# Altium PCB SchemaAf.PcbDoc
Units mil, origin at the board's own origin, x right, y up, seen from the top; angles counter-clockwise.
Board outline 6000 x 2300 mil, 2 copper layers (Top Layer, Bottom Layer); 71 components, 51 nets, 252 pads, 100 vias.
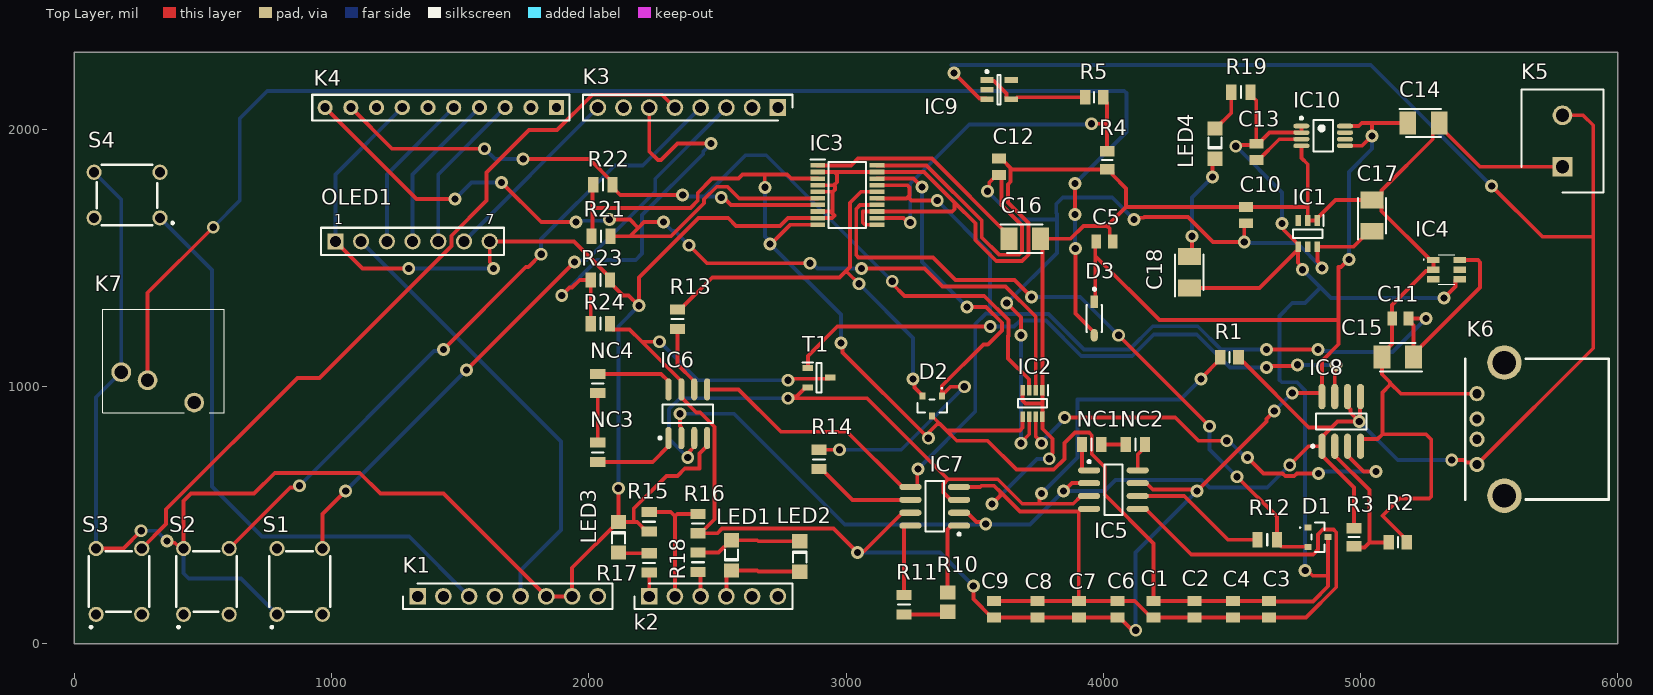
[diagram p0: Top Layer view]
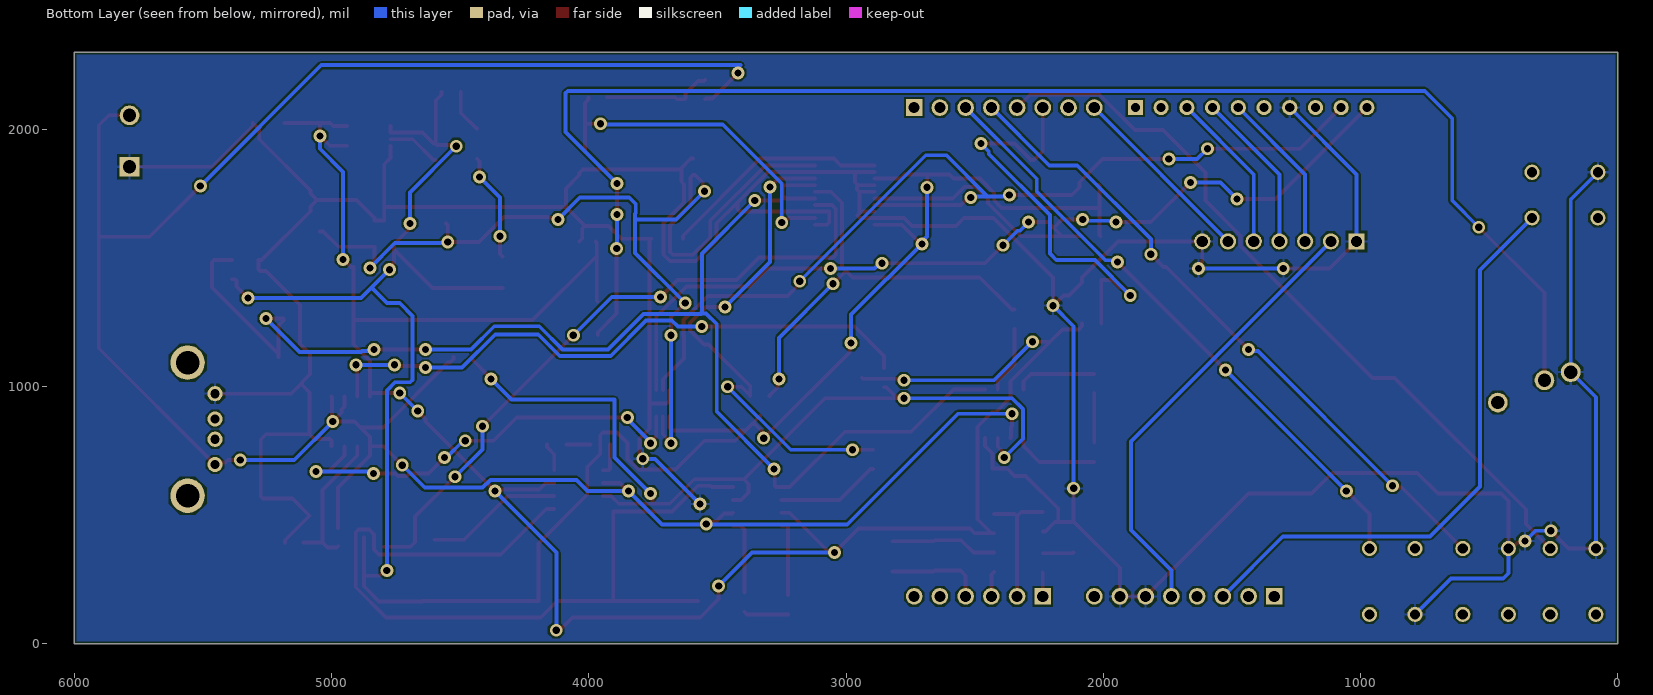
[diagram p1: Bottom Layer view, seen from below]
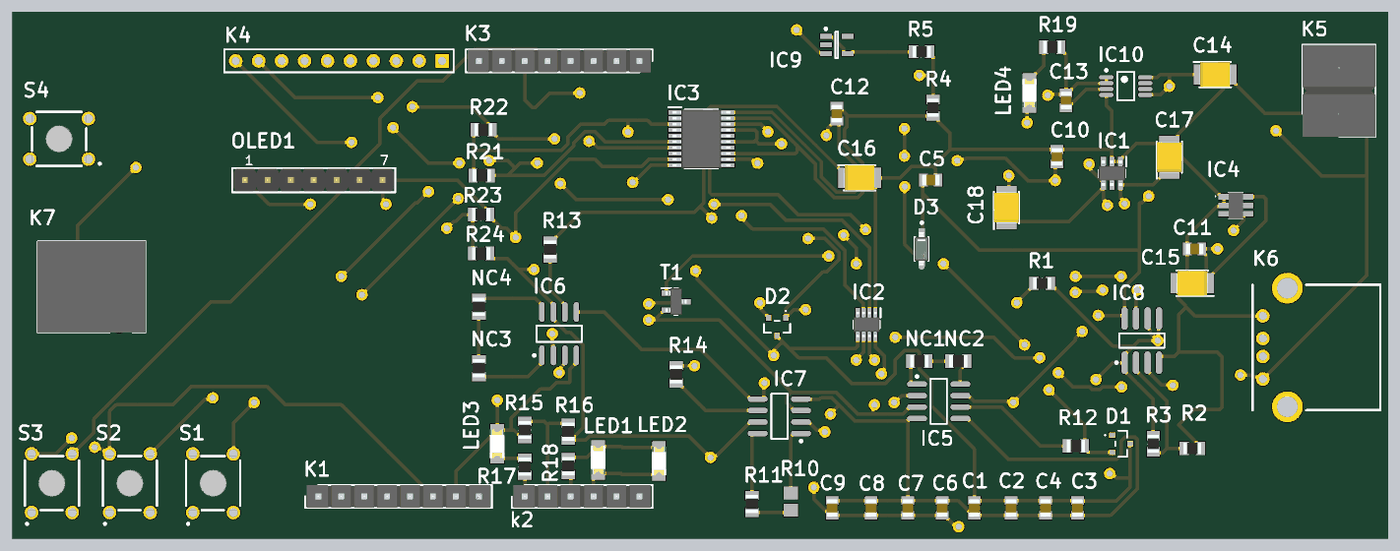
[diagram p2: 3D render of the assembled board from above, using the file's embedded part models]

## Layer stack, top to bottom
Top Solder: solder mask 0.4, Solder Resist, Dk 3.5
Top Layer: signal copper 1.4
Dielectric 1: dielectric 12.6, FR-4, Dk 4.8
Bottom Layer: signal copper 1.4
Bottom Solder: solder mask 0.4, Solder Resist, Dk 3.5

## Board outline
0,0 0,2300 6000,2300 6000,0

## Design rules (kind name [scope] priority, off if disabled: settings)
Clearance [All] p1: gap=7 ignorepadtopadclearanceinfootprint=FALSE
ComponentClearance [All] p1 off: gap=10 collisioncheckmode=3 verticalgap=10 showdistances=FALSE
PolygonConnect [All] p1: connectstyle=Relief reliefconductorwidth=10 reliefentries=4 polygonreliefangle="90 Angle" airgapwidth=10
RoutingVias [All] p1: holewidth=28 width=50 viastyle="Through Hole" minholewidth=28 minwidth=50 maxholewidth=28 maxwidth=50
SolderMaskExpansion [All] p1: expansion=4 istentingtop=FALSE
Width [All] p1: maxlimit=15 minlimit=15 preferedwidth=15 minimp=50.000000 maximp=50.000000 favimp=50.000000
29 further rules are at their usual default settings.

## Components (designator, comment, footprint, x,y, rotation, side; value= is the part's Value field where it differs from the comment)
C1 "MC0805B104K500CT" CAPC2012X90N 4195,135 r270 top
C2 "MC0805B104K500CT" CAPC2012X90N 4355,135 r270 top
C3 "MC0805B104K500CT" CAPC2012X90N 4645,135 r270 top
C4 "MC0805B104K500CT" CAPC2012X90N 4505,135 r270 top
C5 "MC0805B104K500CT" CAPC2012X90N 4005,1565 r180 top
C6 "MC0805B104K500CT" CAPC2012X90N 4055,135 r270 top
C7 "MC0805B104K500CT" CAPC2012X90N 3905,135 r270 top
C8 "MC0805B104K500CT" CAPC2012X90N 3745,135 r270 top
C9 "MC0805B104K500CT" CAPC2012X90N 3575,135 r270 top
C10 "MC0805B104K500CT" CAPC2012X90N 4555,1666.89 r270 top
C11 "MC0805B104K500CT" CAPC2012X90N 5155,1265 r0 top
C12 "MC0805B104K500CT" CAPC2012X90N 3595,1855 r90 top
C13 "MC0805N102J500CT" CAPC2012X90N 4595,1913.11 r90 top
C14 "T491B106M016AT" CAPPM3528X210N 5245,2025 r0 top
C15 "T491B106M016AT" CAPPM3528X210N 5145,1115 r180 top
C16 "T491B106M016AT" CAPPM3528X210N 3695,1575 r0 top
C17 "T491B106M016AT" CAPPM3528X210N 5045,1665 r90 top
C18 "T491B106M016AT" CAPPM3528X210N 4335,1445 r90 top
D1 "BAT54C" NXP-SOT23-3_V 4835,415 r90 top
D2 "BAT54C" NXP-SOT23-3_V 3335,925 r0 top
D3 "1N5819HW-7-F" FP-SOD123-IPC_B 3965,1265 r270 top
IC1 "LT1790ACS6-2.5#PBF" SOT95P280X100-6N 4795,1595 r270 top
IC2 "LTC2631CTS8-LZ12#TRMPBF" SOT65P280X100-8N 3725,935 r270 top
IC3 "LTC2309CF#PBF" SOP65P640X110-20N 3005,1745 r0 top
IC4 "LT1790BCS6-1.25#TRMPBF" LT1790BCS6125TRMPBF 5335,1455 r270 top
IC5 "LT1789CS8-1#PBF" LT-S8-8_N 4039.49,600 r0 top
IC6 "LT1789CS8-10#PBF" LT-S8-8_N 2385,895 r90 top
IC7 "LT1789CS8-10#PBF" LT-S8-8_N 3345,535 r180 top
IC8 "LTC6241HVCS8#PBF" LT-S8-8_M 4925,865 r90 top
IC9 "LTC2054HVCS5#TRMPBF" LT-S5-5-TSOT-23_N 3595,2155 r0 top
IC10 "LT1762EMS8-5#PBF" LT-MS8_N 4855,1975 r0 top
K1 "2211S-08G" HDRV8W64P0X254_1X8_2032X254X874P 1335,185 r0 top
k2 "2211S-06G" HDRV6W64P0X254_1X6_1524X254X1774P 2235,185 r0 top
K3 "2211S-08G" HDRV8W64P0X254_1X8_2032X254X874P 2735,2085 r180 top
K4 "Header 10" HDR1X10 1875,2085 r180 top
K5 "1729128" HDRV2W110P0X508_1X2_1016X810X1000P 5785,1855 r90 top
K6 "61400416021" USB-2.0-TYPE-A 5965,835 r90 top
K7 "NEB_J_21_R" NEBJ21R 182.64,1056.5 r0 top
LED1 "150120RS75000" 1206_A 2555,344.06 r90 top
LED2 "150120GS75000" 1206_A 2820,340 r270 top
LED3 "150120YS75000" 1206_A 2115,415 r270 top
LED4 "150120BS75000" 1206_A 4435,1945 r90 top
NC1 "0" RESC2014X65N 3955,775 r180 top
NC2 "0" RESC2014X65N 4125,775 r0 top
NC3 "MC01W08055100R" RESC2014X65N 2035,745 r270 top
NC4 "0" RESC2014X65N 2035,1012.4 r90 top
OLED1 "61300711121" 61300711121 1315,1565 r0 top
R1 "MCTC0525B1000T5E" RESC2012X65N 4490.43,1115 r0 top
R2 "MCTC0525B1002T5E" RESC2012X65N 5145,395 r180 top
R3 "MCTC0525B1002T5E" RESC2012X65N 4975,415 r270 top
R4 "MCTC0525B1002T5E" RESC2012X65N 4015,1880.43 r90 top
R5 "MCTC0525B1002T5E" RESC2012X65N 3965,2125 r180 top
R10 "ERA6AEB223V" RESC2013X60X40ML20T25 3395,162.4 r90 top
R11 "220R 0.1%" RESC2014X65N 3225,152.4 r90 top
R12 "MC01W08055100R" RESC2014X65N 4637.6,405 r0 top
R13 "MC01W08055100R" RESC2014X65N 2345,1262.4 r90 top
R14 "100R" RESC2014X65N 2895,717.6 r90 top
R15 "3KR" RESC2014X65N 2235,475 r90 top
R16 "MC01W0805512K" RESC2014X65N 2425,467.6 r270 top
R17 "MC01W080551K" RESC2014X65N 2235,315 r270 top
R18 "MC01W080551K" RESC2014X65N 2425,317.6 r270 top
R19 "MC01W080551K" RESC2014X65N 4535,2145 r0 top
R21 "MC01W0805510K" RESC2014X65N 2047.6,1585 r180 top
R22 "MC01W0805510K" RESC2014X65N 2055,1785 r180 top
R23 "MC01W0805510K" RESC2014X65N 2045,1415 r180 top
R24 "22KR" RESC2014X65N 2045,1245 r0 top
S1 "FSM4JH" FSM4JH 876.42,242.95 r90 top
S2 "FSM4JH" FSM4JH 513.58,242.95 r90 top
S3 "FSM4JH" FSM4JH 173.58,242.95 r90 top
S4 "FSM4JH" FSM4JH 205,1745 r180 top
T1 "BC847C_AU,215" SOT95P230X110-3N 2895,1035 r0 top

## Footprints (in the part's own frame and the unit in brackets; to place one, negate y for a bottom-side part, rotate by r counter-clockwise, add the part's x,y. Pads: shape width x height; smd on the part's side, far side on the other; paste and mask are expansions set on the pad)
1206_A [mm] "Chip LED, 2-Leads, Body 3.2x1.6mm, IPC Medium Density"
  rect 1.4x1.5 smd: 1(-1.5,0) 2(1.5,0)
  silkscreen extent -0.5,-0.67 0.6,0.65, body extent -1.6,-0.8 1.6,0.8, height 0.68
61300711121 [mm] "Pin Header, pitch 2.54 mm, THT, Vertical, single row, 7p"
  rect 1.6x1.6 hole 1.1: 1(-7.62,0)
  round 1.6 hole 1.1: 2(-5.08,0) 3(-2.54,0) 4(0,0) 5(2.54,0) 6(5.08,0) 7(7.62,0)
  silkscreen extent -9.04,-1.34 9.04,1.34, body extent -8.89,-1.27 8.89,1.27, height 8.57
CAPC2012X90N [mm]
  rect 0.96x1.39 smd: 1(-0.81,0) 2(0.81,0)
  body extent -1,-0.63 1,0.63, height 0.9
CAPPM3528X210N [mm]
  rect 1.65x2.25 smd: 1(-1.55,0) 2(1.55,0)
  silkscreen extent -2.38,-1.4 1.75,1.4, body extent -1.75,-1.4 1.75,1.4, height 2.1
FP-SOD123-IPC_B [mil]
  rect 49.51x27.66 smd paste+0 mask+0: 1(-64.98,0)
  rrect100% 49.51x27.66 smd paste+0 mask+0: 2(64.98,0)
  silkscreen extent -119,-31 52,31, body extent -100,-40 100,40, height 10
FSM4JH [mm]
  round 1.5 hole 1: 1(-3.25,2.25) 2(3.25,2.25) 3(-3.25,-2.25) 4(3.25,-2.25)
  silkscreen extent -4.6,-3 3,3, body extent -3,-3.9 3,3.9
HDR1X10 [mm] "Connector; Header; 10 Position"
  rect 1.5x1.5 hole 0.9: 1(0,0)
  round 1.5 hole 0.9: 2(2.54,0) 3(5.08,0) 4(7.62,0) 5(10.16,0) 6(12.7,0) 7(15.24,0) 8(17.78,0) 9(20.32,0) 10(22.86,0)
  silkscreen extent -1.27,-1.27 24.13,1.27
HDRV2W110P0X508_1X2_1016X810X1000P [mm]
  rect 1.95x1.95 hole 1.3: 1(0,0)
  round 1.95 hole 1.3: 2(5.08,0)
  silkscreen extent -2.54,-4.05 7.62,4.05, body extent -2.54,-4.05 7.62,4.05, height 10
HDRV6W64P0X254_1X6_1524X254X1774P [mm]
  rect 1.65x1.65 hole 1.1: 1(0,0)
  round 1.65 hole 1.1: 2(2.54,0) 3(5.08,0) 4(7.62,0) 5(10.16,0) 6(12.7,0)
  silkscreen extent -1.45,-1.27 14.15,1.27, body extent -1.27,-1.27 13.97,1.27, height 17.74
HDRV8W64P0X254_1X8_2032X254X874P [mm]
  rect 1.65x1.65 hole 1.1: 1(0,0)
  round 1.65 hole 1.1: 2(2.54,0) 3(5.08,0) 4(7.62,0) 5(10.16,0) 6(12.7,0) 7(15.24,0) 8(17.78,0)
  silkscreen extent -1.45,-1.27 19.23,1.27, body extent -1.27,-1.27 19.05,1.27, height 8.74
LT1790BCS6125TRMPBF [mm]
  rect 0.62x1.22 smd: 1(-0.95,-1.31) 2(0,-1.31) 3(0.95,-1.31) 4(0.95,1.31) 5(0,1.31) 6(-0.95,1.31)
  silkscreen extent -1.45,-2.3 1.45,0.81, body extent -1.45,-0.81 1.45,0.81, height 1.1
LT-MS8_N [mm] "SOP, 8-Leads, Body 3x3mm, Pitch 0.65mm, IPC Medium Density"
  oval 1.6x0.45 smd: 1(-2.15,0.975) 2(-2.15,0.325) 3(-2.15,-0.325) 4(-2.15,-0.975) 5(2.15,-0.975) 6(2.15,-0.325) 7(2.15,0.325) 8(2.15,0.975)
  silkscreen extent -2.27,-1.55 0.95,1.87, body extent -1.55,-1.55 1.55,1.55, height 1.1
LT-S5-5-TSOT-23_N [mm] "SOT23, 5-Leads, Body 2.90x1.63mm, Pitch 0.95mm, IPC Medium Density"
  rect 1.3x0.55 smd: 1(-1.2,0.95) 2(-1.2,0) 3(-1.2,-0.95) 4(1.2,-0.95) 5(1.2,0.95)
  silkscreen extent -1.32,-1.45 0.15,1.9, body extent -0.87,-1.45 0.87,1.45, height 1
LT-S8-8_M [mm] "SOIC, 8-Leads, Body 4.9x3.9mm, Pitch 1.27mm, IPC Low Density"
  oval 2.5x0.7 smd: 1(-2.45,1.905) 2(-2.45,0.635) 3(-2.45,-0.635) 4(-2.45,-1.905) 5(2.45,-1.905) 6(2.45,-0.635) 7(2.45,0.635) 8(2.45,1.905)
  silkscreen extent -2.57,-2.5 0.8,2.93, body extent -2,-2.5 2,2.5, height 1.76
LT-S8-8_N [mm] "SOIC, 8-Leads, Body 4.9x3.9mm, Pitch 1.27mm, IPC Medium Density"
  oval 2.2x0.6 smd: 1(-2.4,1.905) 2(-2.4,0.635) 3(-2.4,-0.635) 4(-2.4,-1.905) 5(2.4,-1.905) 6(2.4,-0.635) 7(2.4,0.635) 8(2.4,1.905)
  silkscreen extent -2.52,-2.5 0.9,2.88, body extent -2,-2.5 2,2.5, height 1.76
NEBJ21R [mm]
  round 1.95 hole 1.3: 1(0,0) 2(2.6,-0.8) 3(7.2,-3)
  silkscreen extent -1.84,-4 10.16,6.2, body extent -1.84,-4 10.16,6.2, height 8.1
NXP-SOT23-3_V [mm] "SOT23, 3-Leads, Body 1.3x2.9mm, Pitch 0.95mm"
  rect 0.6x0.7 smd paste-0.05: 1(0.95,1) 2(-0.95,1) 3(0,-1)
  silkscreen extent -1.45,-0.65 1.45,1.79, body extent -1.45,-0.65 1.45,0.65, height 1.1
RESC2012X65N [mm]
  rect 1.05x1.45 smd: 1(-0.9,0) 2(0.9,0)
  silkscreen extent 0,-0.53 0,0.53, body extent -1,-0.63 1,0.63, height 0.65
RESC2013X60X40ML20T25 [mm] "Chip Resistor, 2-Leads, Body 2.00x1.25mm, IPC Low Density"
  rect 1.4x1.55 smd: 1(-0.95,0) 2(0.95,0)
  body extent -1.1,-0.72 1.1,0.72, height 0.6
RESC2014X65N [mm]
  rect 1x1.5 smd: 1(-0.95,0) 2(0.95,0)
  silkscreen extent 0,-0.59 0,0.59, body extent -1,-0.69 1,0.69, height 0.65
SOP65P640X110-20N [mm]
  rect 1.45x0.45 smd: 1(-2.925,2.925) 2(-2.925,2.275) 3(-2.925,1.625) 4(-2.925,0.975) 5(-2.925,0.325) 6(-2.925,-0.325) 7(-2.925,-0.975) 8(-2.925,-1.625) 9(-2.925,-2.275) 10(-2.925,-2.925) 11(2.925,-2.925) 12(2.925,-2.275) 13(2.925,-1.625) 14(2.925,-0.975) 15(2.925,-0.325) 16(2.925,0.325) 17(2.925,0.975) 18(2.925,1.625) 19(2.925,2.275) 20(2.925,2.925)
  silkscreen extent -3.65,-3.25 1.85,3.5, body extent -3.2,-3.25 3.2,3.25, height 1.1
SOT65P280X100-8N [mm]
  rect 1.05x0.45 smd: 1(-1.3,0.975) 2(-1.3,0.325) 3(-1.3,-0.325) 4(-1.3,-0.975) 5(1.3,-0.975) 6(1.3,-0.325) 7(1.3,0.325) 8(1.3,0.975)
  silkscreen extent -1.82,-1.45 0.42,1.55, body extent -1.4,-1.45 1.4,1.45, height 1
SOT95P230X110-3N [mm]
  rect 1.05x0.6 smd: 1(-1.1,0.95) 2(-1.1,-0.95) 3(1.1,0)
  silkscreen extent -1.62,-1.45 0.22,1.5, body extent -1.15,-1.45 1.15,1.45, height 1.1
SOT95P280X100-6N [mm]
  rect 1.05x0.55 smd: 1(-1.3,0.95) 2(-1.3,0) 3(-1.3,-0.95) 4(1.3,-0.95) 5(1.3,0) 6(1.3,0.95)
  silkscreen extent -1.82,-1.45 0.43,1.58, body extent -1.4,-1.45 1.4,1.45, height 1
USB-2.0-TYPE-A [mm]
  round 1.5 hole 0.92: 1(-3.5,13.01) 2(-1,13.01) 3(1,13.01) 4(3.5,13.01)
  round 3.4 hole 2.3: 5(-6.57,10.3) 6(6.57,10.3)
  silkscreen extent -6.95,0 6.95,14.15

## Part data
C1 C2 C3 C4 C5 C6 C7 C8 C9 C10 C11 C12 C13: "Capacitor", Manufacturer_Name=MULTICOMP, Height=0.9mm
  C1 C2 C3 C4 C5 C6 C7 C8 C9 C10 C11 C12: Datasheet Link=https://componentsearchengine.com/Datasheets/2/MC0805B104K500CT.pdf, Manufacturer_Part_Number=MC0805B104K500CT
  C13: Datasheet Link=http://www.farnell.com/datasheets/1901289.pdf, Manufacturer_Part_Number=MC0805N102J500CT
C14 C15 C16 C17 C18: "Capacitor Polarised", Manufacturer_Name=Kemet, Mouser Part Number=80-T491B106M016, Arrow Part Number=T491B106M016AT, Arrow Price/Stock=https://www.arrow.com/en/products/t491b106m016at/kemet-corporation, Datasheet Link=https://componentsearchengine.com/Datasheets/2/T491B106M016AT.pdf, Height=2.1mm, Manufacturer_Part_Number=T491B106M016AT, Mouser Price/Stock=https://www.mouser.co.uk/ProductDetail/KEMET/T491B106M016AT?qs=WydH9nGI6cAnkEyQJLjSzA%3D%3D
D1 D2: library part CMP-0417-00003-1, "Schottky Barrier Diode, 30 V, 2 uA, -55 to 150 degC, 3-Pin SOT23, RoHS, Tape and Reel", Manufacturer="NXP Semiconductors", Temperature Range="-55 to 150 degC", Cd (pF)=10, ComponentLink1Description="Manufacturer URL", ComponentLink1URL=http://www.nxp.com/, ComponentLink2Description=Datasheet, ComponentLink2URL=http://www.nxp.com/documents/data_sheet/BAT54_SER.pdf, DatasheetVersion="Rev. 5", IR (uA)=2, Mounting Technology="Surface Mount", PackageDescription="3-Pin Plastic Surface-mounted Package, Body 1.3 x 2.9 mm, Pitch 0.95 mm", PackageReference=SOT23-3, Packing="Tape and Reel", PartNumber=BAT54C, RoHS=TRUE, Rth(j-a) (K/W)=500, Trr (ns)=5, VF (mV)=800, VR (V)=30
D3: library part CMP-0303-00003-3, "DIODE SCHOTTKY 40V 1A SOD123", Average Rectified Current=1A, Capacitance=110pF, Case/Package=SOD-123-2, Forward Voltage=450mV, Max Forward Surge Current (Ifsm)=25A, Max Operating Temperature=125°C, Max Power Dissipation=450mW, Max Repetitive Reverse Voltage (Vrrm)=40V, Min Operating Temperature=-65°C, Package Quantity=3000, Peak Reverse Current=50uA, Contact Plating=Tin, Current Rating=1A, Element Configuration=Single, Forward Current=1A, Height=1.25mm, Lead Free="Lead Free", Length=2.85mm, Max Reverse Voltage (DC)=40V, Number of Pins=2, Output Current=1A, Packaging="Tape and Reel", Peak Non-Repetitive Surge Current=25A, Polarity=Standard, Radiation Hardening=No, REACH SVHC="No SVHC", Termination=SMD/SMT, Voltage Rating (DC)=40V, Weight=0.000353oz, Width=1.7mm
IC1: "Integrated Circuit", Manufacturer_Name="Linear Technology", Mouser Part Number=584-1790ACS6-2.5PBF, Datasheet Link=https://componentsearchengine.com/Datasheets/2/LT1790ACS6-2.5#PBF.pdf, Height=1mm, Manufacturer_Part_Number=LT1790ACS6-2.5#PBF, Mouser Price/Stock=https://www.mouser.com/Search/Refine.aspx?Keyword=584-1790ACS6-2.5PBF
IC2: "Integrated Circuit", Manufacturer_Name="Analog Devices", Mouser Part Number=584-2631CTS8LZ12TMPF, Arrow Part Number=LTC2631CTS8-LZ12#TRMPBF, Arrow Price/Stock=https://www.arrow.com/en/products/ltc2631cts8-lz12trmpbf/analog-devices, Datasheet Link=https://www.analog.com/media/en/technical-documentation/data-sheets/2631fd.pdf, Height=1mm, Manufacturer_Part_Number=LTC2631CTS8-LZ12#TRMPBF, Mouser Price/Stock=https://www.mouser.co.uk/ProductDetail/Analog-Devices/LTC2631CTS8-LZ12TRMPBF?qs=hVkxg5c3xu%252BAZArayp8N8g%3D%3D
IC3: "Integrated Circuit", Manufacturer_Name="Linear Technology", Mouser Part Number=584-LTC2309CF#PBF, Arrow Part Number=LTC2309CF#PBF, Arrow Price/Stock=https://www.arrow.com/en/products/ltc2309cfpbf/linear-technology, Datasheet Link=http://docs-emea.rs-online.com/webdocs/10c2/0900766b810c2cad.pdf, Height=1.1mm, Manufacturer_Part_Number=LTC2309CF#PBF, Mouser Price/Stock=https://www.mouser.com/Search/Refine.aspx?Keyword=584-LTC2309CF%23PBF
IC4: "Integrated Circuit", Manufacturer_Name="Analog Devices", Mouser Part Number=584-1790BCS61.25TMPF, Arrow Part Number=LT1790BCS6-1.25#TRMPBF, Arrow Price/Stock=https://www.arrow.com/en/products/lt1790bcs6-1.25trmpbf/analog-devices, Datasheet Link=https://www.arrow.com/en/products/lt1790bcs6-1.25trmpbf/analog-devices, Height=1mm, Manufacturer_Part_Number=LT1790BCS6-1.25#TRMPBF, Mouser Price/Stock=https://www.mouser.co.uk/ProductDetail/Analog-Devices/LT1790BCS6-125TRMPBF/?qs=ytflclh7QUXpPD13KZ8jjg%3D%3D
IC5: library part CMP-0359-03660-2, "Single Channel, Micropower, Single Supply Rail-to-Rail Output Instrumentation Amplifiers, 0.06 MHz Typical GBW, 0.026 V/us Typical SR, 2.2 to 36 V, 8-Pin SOIC (S8-8), Commercial, Pb-Free", Linear Technology Part Number=LT1789-1, Manufacturer="Linear Technology", Channels (#)=1, ComponentLink1Description="Manufacturer URL", ComponentLink1URL=http://www.linear.com/, ComponentLink2Description=Datasheet, ComponentLink2URL=http://cds.linear.com/docs/en/datasheet/1789fc.pdf, ComponentLink3Description="Package Specification", ComponentLink3URL=http://cds.linear.com/docs/en/packaging/05081610_G_SO8.pdf, DatasheetVersion="Rev. C", GBW (MHz) Typical=0.06, Is (mA) Typical=0.067, Mounting Technology="Surface Mount", PackageDescription="8-Pin Plastic Small Outline, Body 4.9 x 3.9 mm, Pitch 1.27 mm", PackageReference=LT-S8-8, PackageVersion="Rev G", PartNumber=LT1789CS8-1#PBF, RevisionNote="URLs updated", RoHS=Pb-Free, SR (V/us) Typical=0.026, Type=IA, Vos (mV) Guaranteed=0.75, Vos (mV) Typical=0.15, Vs Max (V)=36, Vs Min (V)=2.2
IC6 IC7: library part CMP-0359-03644-3, "Single Channel, Micropower, Single Supply Rail-to-Rail Output Instrumentation Amplifiers, 0.06 MHz Typical GBW, 0.026 V/us Typical SR, 2.2 to 36 V, 8-Pin SOIC (S8-8), Commercial, Pb-Free", Linear Technology Part Number=LT1789-10, Manufacturer="Linear Technology", Channels (#)=1, ComponentLink1Description="Manufacturer URL", ComponentLink1URL=http://www.linear.com/, ComponentLink2Description=Datasheet, ComponentLink2URL=http://cds.linear.com/docs/en/datasheet/1789fc.pdf, ComponentLink3Description="Package Specification", ComponentLink3URL=http://cds.linear.com/docs/en/packaging/05081610_G_SO8.pdf, DatasheetVersion="Rev. C", GBW (MHz) Typical=0.06, Is (mA) Typical=0.067, Mounting Technology="Surface Mount", PackageDescription="8-Pin Plastic Small Outline, Body 4.9 x 3.9 mm, Pitch 1.27 mm", PackageReference=LT-S8-8, PackageVersion="Rev G", PartNumber=LT1789CS8-10#PBF, RevisionNote="URLs updated", RoHS=Pb-Free, SR (V/us) Typical=0.026, Type=IA, Vos (mV) Guaranteed=3, Vos (mV) Typical=0.65, Vs Max (V)=36, Vs Min (V)=2.2
IC8: library part CMP-0359-02698-2, "Dual Channel, Low Noise, CMOS Operational Amplifier, RRO, 18 MHz Typical GBW, 10 V/us Typical SR, 2.8 to 12 V, 8-Pin SOIC (S8-8), Commercial, Pb-Free", Linear Technology Part Number=LTC6241HV, Manufacturer="Linear Technology", Channels (#)=2, ComponentLink1Description="Manufacturer URL", ComponentLink1URL=http://www.linear.com/, ComponentLink2Description=Datasheet, ComponentLink2URL=http://cds.linear.com/docs/en/datasheet/624012fe.pdf, ComponentLink3Description="Package Specification", ComponentLink3URL=http://cds.linear.com/docs/en/packaging/05081610_G_SO8.pdf, DatasheetVersion="Rev. E", GBW (MHz) Typical=18, Is (mA) Typical=1.8, Mounting Technology="Surface Mount", PackageDescription="8-Pin Plastic Small Outline, Body 4.9 x 3.9 mm, Pitch 1.27 mm", PackageReference=LT-S8-8, PackageVersion="Rev G", PartNumber=LTC6241HVCS8#PBF, RevisionNote="URLs updated", RoHS=Pb-Free, SR (V/us) Typical=10, Type=VFB, Vos (mV) Typical=0.04, Vs Max (V)=12, Vs Min (V)=2.8
IC9: library part CMP-0359-02161-2, "Single Channel, Micropower Zero-Drift Operational Amplifier, 0.5 MHz Typical GBW, 0.5 V/us Typical SR, 2.7 to 11 V, 5-Pin SOT23 (S5-5), Commercial, Pb-Free, Mini Reel", Linear Technology Part Number=LTC2054HV, Manufacturer="Linear Technology", Channels (#)=1, Code_JEDEC=MO-193, ComponentLink1Description="Manufacturer URL", ComponentLink1URL=http://www.linear.com/, ComponentLink2Description=Datasheet, ComponentLink2URL=http://cds.linear.com/docs/en/datasheet/20545fc.pdf, ComponentLink3Description="Package Specification", ComponentLink3URL=http://cds.linear.com/docs/en/packaging/SOT_5_05-08-1635.pdf, DatasheetVersion="Rev. C", GBW (MHz) Typical=0.5, Is (mA) Typical=0.15, Mounting Technology="Surface Mount", PackageDescription="5-Lead Plastic TSOT-23, Body 1.63 x 2.90 mm, Pitch 0.95 mm", PackageReference=LT-S5-5-TSOT-23, Packing="Mini Reel", PartNumber=LTC2054HVCS5#TRMPBF, RevisionNote="URLs updated", RoHS=Pb-Free, SR (V/us) Typical=0.5, Type=ZD, Vos (mV) Typical=0.0005, Vs Max (V)=11, Vs Min (V)=2.7
IC10: library part CMP-0476-00707-1, "150 mA, Low Noise, LDO Micropower Regulator, 1.8 to 20 V Vin, 5 V Vout, 8-pin SOP (MS8-8), -40 to 125 degC, Pb-Free", Dropout Voltage(V)=0.27, Manufacturer="Linear Technology", Output Voltage="5 V", Shutdown Current(uA)=1, ComponentLink1Description="Manufacturer URL", ComponentLink1URL=http://www.linear.com/, ComponentLink2Description=Datasheet, ComponentLink2URL=http://cds.linear.com/docs/en/datasheet/1762fa.pdf, ComponentLink3Description="Package Specification", ComponentLink3URL=http://cds.linear.com/docs/en/packaging/05081660_G_MS8.pdf, DatasheetVersion="Rev. A", Discrete Pass Element=no, Iout(mA)=150, Isupply(mA)=0.025, Mounting Technology="Surface Mount", Noise(uV)=20, Number of Outputs=1, PackageDescription="8-Pin Plastic MSOP, Body 3 x 3 mm, Pitch 0.65 mm", PackageReference=MS8, PackageVersion="Rev. G, 05/2013", PartNumber=LT1762EMS8-5#PBF, PSRR(dB)=65, RoHS=TRUE, Vin Max(V)=20, Vin Min(V)=1.8
K1 k2 K3: "Connector", Manufacturer_Name=MULTICOMP
  K1 K3: Datasheet Link=https://componentsearchengine.com/Datasheets/2/2211S-08G.pdf, Height=8.74mm, Manufacturer_Part_Number=2211S-08G
  k2: Datasheet Link=http://www.farnell.com/datasheets/1518407.pdf, Height=17.74mm, Manufacturer_Part_Number=2211S-06G
K4: "Header, 10-Pin", LatestRevisionDate=17-Jul-2002, LatestRevisionNote="Re-released for DXP Platform.", Publisher="Altium Limited"
K5: "Connector", Manufacturer_Name="Phoenix Contact", Mouser Part Number=651-1729128, Arrow Part Number=1729128, Arrow Price/Stock=https://www.arrow.com/en/products/1729128/phoenix-contact, Datasheet Link=http://docs-emea.rs-online.com/webdocs/1380/0900766b81380189.pdf, Height=10mm, Manufacturer_Part_Number=1729128, Mouser Price/Stock=https://www.mouser.co.uk/ProductDetail/Phoenix-Contact/1729128/?qs=GFUSqQMLmmnCBVBY3dts9w%3D%3D
K6: "Connector", Manufacturer_Name="Wurth Elektronik", Mouser Part Number=710-61400416021, Datasheet Link=http://katalog.we-online.de/em/datasheet/61400416021.pdf, Manufacturer_Part_Number=61400416021, Mouser Price/Stock=https://www.mouser.co.uk/ProductDetail/Wurth-Elektronik/61400416021/?qs=rS3zZhy2AQM1ZldAqz%2FFOw%3D%3D
K7: "Connector", Manufacturer_Name=LUMBERG, Manufacturer_Part_Number="NEB/J 21 R", Datasheet Link=http://www.farnell.com/datasheets/2047481.pdf?_ga=2.269136052.479969064.1560760329-167411096.1502103357, Height=8mm
LED1: library part CMP-1426-00013-1, "SMD mono-color Chip LED, WL-SMCW, Red", Color=Red, Manufacturer="Wuerth Elektronik", ComponentLink1Description="Manufacturer URL", ComponentLink1URL=http://www.we-online.com, ComponentLink2Description=Datasheet, ComponentLink2URL=http://katalog.we-online.com/led/datasheet/150120RS75000.pdf, PackageReference=1206_A, PartNumber=150120RS75000
LED2: library part CMP-1426-00014-1, "SMD mono-color Chip LED, WL-SMCW, Green", Color=Green, Manufacturer="Wuerth Elektronik", ComponentLink1Description="Manufacturer URL", ComponentLink1URL=http://www.we-online.com, ComponentLink2Description=Datasheet, ComponentLink2URL=http://katalog.we-online.com/led/datasheet/150120GS75000.pdf, PackageReference=1206_A, PartNumber=150120GS75000
LED3: library part CMP-1426-00019-1, "SMD mono-color Chip LED, WL-SMCW, Yellow", Color=Yellow, Manufacturer="Wuerth Elektronik", ComponentLink1Description="Manufacturer URL", ComponentLink1URL=http://www.we-online.com, ComponentLink2Description=Datasheet, ComponentLink2URL=http://katalog.we-online.com/led/datasheet/150120YS75000.pdf, PackageReference=1206_A, PartNumber=150120YS75000
LED4: library part CMP-1426-00015-1, "SMD mono-color Chip LED, WL-SMCW, Blue", Color=Blue, Manufacturer="Wuerth Elektronik", ComponentLink1Description="Manufacturer URL", ComponentLink1URL=http://www.we-online.com, ComponentLink2Description=Datasheet, ComponentLink2URL=http://katalog.we-online.com/led/datasheet/150120BS75000.pdf, PackageReference=1206_A, PartNumber=150120BS75000
NC1 NC2 NC4 R11 R14 R15 R24: library part MC01W08055100R, "Resistor", Manufacturer_Name=MULTICOMP, Datasheet Link=http://www.farnell.com/datasheets/1729047.pdf, Height=0.65mm, Manufacturer_Part_Number=MC01W08055100R
NC3 R1 R2 R3 R4 R5 R12 R13 R16 R17 R18 R19 R21 R22 R23: "Resistor", Manufacturer_Name=MULTICOMP, Height=0.65mm
  NC3 R12 R13: Datasheet Link=http://www.farnell.com/datasheets/1729047.pdf, Manufacturer_Part_Number=MC01W08055100R
  R1: Datasheet Link=https://componentsearchengine.com/Datasheets/2/MCTC0525B1001T5E.pdf, Manufacturer_Part_Number=MCTC0525B1000T5E
  R2 R3 R4 R5: Datasheet Link=https://componentsearchengine.com/Datasheets/2/MCTC0525B1001T5E.pdf, Manufacturer_Part_Number=MCTC0525B1002T5E
  R16: Datasheet Link=http://www.farnell.com/datasheets/1729047.pdf, Manufacturer_Part_Number=MC01W0805512K
  R17 R18 R19: Datasheet Link=http://www.farnell.com/datasheets/1729047.pdf, Manufacturer_Part_Number=MC01W080551K
  R21 R22 R23: Datasheet Link=http://www.farnell.com/datasheets/1729047.pdf, Manufacturer_Part_Number=MC01W0805510K
OLED1: library part CMP-1502-01074-1, "THT Vertical Pin Header WR-PHD, Pitch 2.54 mm, Single Row, 7 pins", Contact Resistance=20mOhm, Manufacturer="Wurth Elektronik", Operating Temperature=-40to105degC, Rated Current=3A, Withstanding Voltage=500VAC, Working Voltage=250VAC, Datasheet URL=https://katalog.we-online.de/em/datasheet/6130xx11121.pdf, Gender=Male, Manufacturer URL=http://www.we-online.de, Mounting Technology=THT, Orientation=Vertical, Package Reference=61300711121, Packaging=Bag, Part Number=61300711121, Pin Number=7, Pitch=2.54mm, Publisher=WurthElektronik, Row Number=Single
R10: library part CMP-2001-00614-1, Manufacturer=Panasonic, Part Number=ERA6AEB223V
S1 S2 S3 S4: "Switch", Manufacturer_Name="TE Connectivity", Mouser Part Number=506-FSM4JH, Arrow Part Number=FSM4JH, Arrow Price/Stock=https://www.arrow.com/en/products/fsm4jh/te-connectivity, Datasheet Link=http://www.te.com/commerce/DocumentDelivery/DDEController?Action=showdoc&DocId=Customer+Drawing%7F1825910%7FC9%7Fpdf%7FEnglish%7FENG_CD_1825910_C9.pdf%7F1825910-6, Manufacturer_Part_Number=FSM4JH, Mouser Price/Stock=https://www.mouser.co.uk/ProductDetail/TE-Connectivity-Alcoswitch/FSM4JH/?qs=g%252BEszo6zu8OwVWrHD2r3Rw%3D%3D
T1: "Transistor BJT NPN", Manufacturer_Name=Nexperia, Manufacturer_Part_Number=BC847C/AU,215, Datasheet Link=http://assets.nexperia.com/documents/data-sheet/BC847_SER.pdf, Height=1.1mm

## Via types
v1: diameter 50, hole 28, Top Layer to Bottom Layer, 100 vias

## Nets (pads, with @x,y where several pads share a name; then routed paths per layer and width w, separated by ;. In a path a pad name is that pad's centre, name@x,y a point inside that pad or via, vN(x,y) a via of type N, cw(c..) or ccw(c..) an arc to the next point about the centre after c; other vN are vias at no path point)
+1.25: C11.2 C15.1 IC3.15 IC3.17 IC4.6 IC6.5 IC7.5 | length 5368.3
  Top Layer w15: IC6.5 2582.25,989.49 2746.74,825 3004.02,825 3219.02,610 3273.01,610 3276.99,613.98 3276.99,677.52 v1(3279.47,680) ; IC3.15 3160.8,1732.2 3162,1731 3162.44,1731.44 3235.65,1731.44 3247,1742.79 3247,1774.6 3238.21,1783.39 IC3.17 ; 3241.32,1737.11 3254.91,1723.52 v1(3354.64,1723.52) ; v1(4635,1145) v1(4835,1145) ; C15.1 C15.1@5206.02,1126.81 ; v1(5255,1265) C11.2 5186.89,1256.54 5206.02,1237.4 C15.1@5206.02,1126.81 ; IC4.6 5456.21,1492.4 5465,1483.62 5465,1385.79 C15.1@5206.02,1126.81
  Bottom Layer w15: v1(3279.47,680) 3502.5,903.03 3502.5,1243.71 3543.79,1285 3560,1285 ; v1(3354.64,1723.52) 3560,1518.16 3560,1285 ; v1(4635,1145) 4457.5,1145 4367.5,1235 4192.5,1235 4102.5,1145 3925,1145 3787.55,1282.45 3562.55,1282.45 3560,1285 ; v1(4835,1145) 4841.7,1138.3 4881.7,1138.3 4885,1135 5125,1135 v1(5255,1265)
+2.5: C10.2 C12.1 C17.1 IC1.6 IC2.6 IC3.20 | length 4206.9
  Top Layer w15: IC3.20 3313.46,1860.16 3527.95,1645.67 3527.95,1579.51 3594.25,1513.21 3673.71,1513.21 3683.96,1523.46 3683.96,1626.54 3604.61,1705.89 3604.61,1813.5 C12.1 3586.54,1823.11 3556.7,1793.27 3556.7,1766.7 v1(3550,1760) ; v1(3624.95,1324.95) 3680,1269.9 v1(3680,1200) ; v1(3680,780) 3680,782.77 3712.2,814.97 IC2.6 ; v1(4120,1650) 4126.7,1656.7 4156.7,1656.7 4160,1660 4330.1,1660 4427.1,1563 v1(4548,1563) 4548,1628 C10.2 ; v1(4850,1462) 4850,1471.47 4832.4,1489.07 IC1.6 4973.03,1543.82 5033.19,1603.98 C17.1
  Bottom Layer w15: v1(3550,1760) 3660,1650 3820,1650 ; v1(3624.95,1324.95) 3820,1520 3820,1650 ; v1(3680,780) v1(3680,1200) ; v1(4120,1650) 4035,1735 3842.4,1735 3817.5,1710.1 3817.5,1674.9 3820,1672.4 3820,1650 ; v1(4548,1563) 4553,1558 4754,1558 v1(4850,1462)
+5: C1.1 C2.1 C3.1 C4.1 C13.2 C18.1 D1.3 D2.3 IC1.4 IC2.5 IC3.3 IC3.10 IC4.4 IC10.1 IC10.2 R19.2 R21.2 R22.2 | length 9180.6
  Top Layer w15: R21.2 2013.9,1588.7 2013.9,1695 ; R22.2 2013.9,1781.3 2013.9,1695 ; v1(2685,1775) 2684.41,1775.59 2684.41,1825 ; v1(2705,1555) 2708.84,1555 2783.68,1629.84 IC3.10 ; IC3.3 2787.13,1808.98 2771.1,1825 2684.41,1825 ; v1(2980,1170) 2986.7,1163.3 2986.7,1133.3 v1@3310,810 ; v1(3320.05,799.95) v1@3310,810 ; D2.3 3335,883.66 3339.31,879.35 3341.28,879.35 3390.63,830 ; 3365.95,854.67 3354.68,854.67 v1@3310,810 ; IC2.5 3686.61,840.65 3675.97,830 3390.63,830 ; C18.1 4607.6,1383.98 IC1.4@4757.6,1533.98 ; v1(4515,1935) 4520,1940 4590,1940 C13.2 ; R19.2 4572.4,2135.16 4595,2112.56 C13.2 ; v1(4695,1635) 4701.7,1628.3 4701.7,1609.56 4757.6,1553.66 IC1.4 IC1.4@4757.6,1533.98 ; IC10.1 IC10.2 4646.26,1987.8 4603.46,1945 C13.2 ; v1(4775,1455) 4775,1464.47 4757.6,1481.87 IC1.4@4757.6,1533.98 ; v1(4785,285) 4794.47,285 4814.47,265 4874.37,265 ; D1.3 4874.37,265 ; v1(5325,1345) 5370.06,1390.06 5370.06,1412.89 5374.76,1417.6 IC4.4 ; 2013.9,1695 2395,1695 2423.49,1723.49 2423.49,1753.49 2478.98,1808.98 2581.69,1808.98 2597.72,1825 2684.41,1825 ; 3390.63,830 3430.63,790 3550,790 3662.5,677.5 3807.6,677.5 3849.13,719.03 3849.13,780.5 3890.66,822.03 3944.53,822.03 3955.22,811.34 3955.22,738.22 4005.81,687.63 4005.81,580.22 4195,391.03 C1.1 C2.1 C4.1 C3.1 4646.89,165 4815,165 4874.37,224.37 4874.37,265
  Bottom Layer w15: v1(2685,1775) 2685,1584.47 2705,1564.47 v1(2705,1555) 2980,1280 v1(2980,1170) ; v1(4515,1935) 4695,1755 v1(4695,1635) ; v1(4775,1455) 4845,1385 ; v1(4785,285) 4785,985.1 4752.6,1017.5 4693.79,1017.5 4685,1026.29 4685,1275 4735,1325 4785,1325 4845,1385 ; v1(5325,1345) 4885,1345 4845,1385
GND: C1.2 C2.2 C3.2 C4.2 C5.1 C6.1 C7.1 C8.1 C9.1 C10.1 C11.1 C12.2 C14.2 C15.2 C16.2 C17.2 IC1.1 IC1.2 IC2.1 IC2.4 IC2.8 IC3.2 IC3.4 IC3.5 IC3.8 IC3.9 IC3.11 IC3.13 IC3.19 IC4.1 IC4.2 IC5.4 IC5.5 IC6.4 IC7.4 IC8.4 IC10.4 K1.6 K1.7 K4.7 K5.1 K6.4 K7.1 LED3.1 OLED1.1 OLED1.7 R2.1 R4.1 R15.1 R23.1 S1.1 S2.2 S3.2 S4.4 | length 22100
  Top Layer w15: S3.2 190.9,370.9 v1(260,440) ; v1(360,400) 366.7,393.3 390.68,393.3 413.08,370.9 S2.2 425,556.21 453.79,585 699.09,585 779.09,665 1109.7,665 1189.7,585 1435,585 K1.6 K1.7 1935,296.02 2113.03,474.06 LED3.1 ; OLED1.1 1120,1460 v1(1300,1460) ; v1(1630,1460) 1630,1469.47 1615,1484.47 OLED1.7 1942.24,1565 2082.4,1424.84 R23.1 2082.4,1405.16 2132.56,1355 2155,1355 v1(2195,1315) 2195,1424.29 2426.14,1655.43 2542.07,1655.43 2572.5,1625 2743.48,1625 2773.92,1655.43 IC3.9 2945.43,1655.43 2955,1665 2946.99,1673.01 ; v1(2115,605) LED3.1 ; R15.1 2225.16,437.6 2188.7,474.06 2175,474.06 ; IC6.4 2460,769.02 2431.08,740.1 2431.08,682.27 2373.25,682.27 2344.34,653.35 2301.99,653.35 2175,526.36 2175,474.06 ; IC3.8 2938.98,1681.02 2946.99,1673.01 ; IC3.5 2948.98,1757.8 ; IC3.4 2953.39,1783.39 ; IC3.2 2955.43,1834.57 ; IC3.11 3073.79,1629.84 3065,1638.63 3065,1681 IC3.13 3413.21,1681.02 3422,1689.81 3422,1716.27 ; IC7.4 3521.66,610 3526.66,615 3575,615 3600,590 ; v1(3567.38,544.48) 3600,577.1 3600,590 ; C9.1 C8.1 C7.1 ; C12.2 3603.46,1886.89 3645.35,1845 R4.1 4022.87,1845 4036.04,1831.83 4036.04,1823.96 4088.78,1771.22 4088.78,1698.78 ; 3639.86,1849.26 3639.86,1796.96 3629.61,1786.71 3629.61,1716.24 3708.96,1636.9 3708.96,1513.1 3684.06,1488.21 3583.89,1488.21 3502.95,1569.15 3502.95,1635.32 3422,1716.27 ; IC2.4 3686.61,946.61 3698.23,935 3763.39,935 ; v1(3790,720) 3790,729.47 3802.5,741.97 3802.5,797.6 3763.39,836.72 3763.39,935 ; C5.1 4025.49,1576.4 4025.49,1614.51 4015,1625 ; IC5.5 4165.47,525 4342.19,348.29 4816.66,348.29 4835,366.63 4835,425.97 4853.34,444.31 4895.4,444.31 4905.65,434.06 4905.65,220.29 4788.47,103.11 C3.2 C4.2 C2.2 C1.2 4186.54,103.11 4122.76,166.89 C6.1 C7.1 ; IC10.4 4770.35,1889.65 4795,1865 4795,1698.78 IC1.2 IC1.1 4832.4,1656.02 4902.4,1726.02 C17.2 C17.2@5056.81,1726.02 ; 4795,1695 4791.22,1698.78 4088.78,1698.78 ; IC8.4 5000,790.68 5005.8,796.48 5066.48,796.48 5085,815 ; R2.1 5180.43,402.87 5085,498.31 5151.69,565 5266.21,565 5275,573.79 5275,795 5255,815 5085,815 ; K6.4 5157.21,972.79 5115,1015 ; K5.1 5464.21,1855 5306.02,2013.19 C14.2 5281.04,2000.02 5281.04,1962.07 5081.79,1762.82 5081.79,1751 C17.2@5056.81,1726.02 ; LED3.1 2175,474.06 ; 2946.99,1673.01 2946.99,1755.81 2948.98,1757.8 ; 2948.98,1757.8 2957.76,1766.58 2957.76,1779.01 2953.39,1783.39 ; 2953.39,1783.39 2965,1795 2965,1825 2955.43,1834.57 ; 2955.43,1834.57 IC3.19 3303.7,1834.57 3422,1716.27 ; 3600,590 3675.84,514.16 3905,514.16 C7.1 ; 3763.39,935 IC2.1 3763.39,1567.64 C16.2 3873,1575 3923,1625 4015,1625 ; 4015,1625 4088.78,1698.78 ; C17.2@5056.81,1726.02 5081.79,1701.04 5081.79,1682.23 5271.61,1492.4 IC4.1 IC4.2 5278.72,1450.3 5255.15,1450.3 5123.11,1318.25 C11.1 5123.11,1165.95 5083.98,1126.81 C15.2 5083.98,1048.21 5115,1017.18 5115,1015 ; 5085,815 5085,977.82 5115,1007.82 5115,1015
  Bottom Layer w15: S4.4 182.64,1727.99 K7.1 85,958.86 S3.2 ; v1(260,440) 320,440 v1(360,400) ; S2.2 425,275 445,255 647.84,255 S1.1 ; OLED1.1 1015,1825 K4.7 ; v1(1300,1460) v1(1630,1460) ; v1(2115,605) 2115,1235 v1(2195,1315) ; v1(3567.38,544.48) 3742.5,719.6 3789.6,719.6 v1(3790,720)
NetC13_1: C13.1 IC10.3 | length 208.9
  Top Layer w15: C13.1 4603.46,1881.22 4684.45,1962.2 IC10.3
NetC16_1: C16.1 IC3.1 | length 891
  Top Layer w15: IC3.1 3020.24,1860.16 3046.6,1886.52 3334.27,1886.52 3633.98,1586.81 C16.1
NetC18_2: C18.2 LED4.1 | length 421.3
  Top Layer w15: C18.2 4345,1516.02 v1(4345,1585) ; v1(4425,1815) 4425,1875.94 LED4.1
  Bottom Layer w15: v1(4345,1585) 4345,1735 v1(4425,1815)
NetD1_2: D1.2 IC3.14 R12.2 | length 2603
  Top Layer w15: IC3.14 3119.57,1706.02 3054.67,1706.02 3040,1691.36 3040,1511.29 3048.79,1502.5 3337.6,1502.5 3425.1,1415 3655.1,1415 v1(3720.89,1349.22) ; v1(4060,1200) v1(4413.62,846.41) ; v1(4520,650) 4675,495 R12.2 4675,395.16 4692.56,377.6 D1.2
  Bottom Layer w15: v1(3720.89,1349.22) 3910.78,1349.22 v1(4060,1200) ; v1(4413.62,846.41) 4413.62,756.38 v1(4520,650)
NetD2_1: D2.1 IC3.18 R14.2 | length 2048.1
  Top Layer w15: R14.2 v1(2975,755) ; IC3.18 3179.41,1808.98 3180,1809.57 3261.73,1809.57 v1(3295.38,1775.92) ; D2.1 D2.1@3372.4,966.34 ; v1(3460,1000) 3406.06,1000 D2.1@3372.4,966.34 ; v1(3470,1310) 3544.44,1310 3606.05,1248.38 3606.05,1218.95 3551.3,1164.2 3534.1,1164.2 3372.4,1002.51 D2.1@3372.4,966.34
  Bottom Layer w15: v1(2975,755) 3215,755 v1(3460,1000) ; v1(3295.38,1775.92) 3295.38,1484.62 v1(3470,1310)
NetD2_2: D2.2 IC3.16 R13.2 | length 1779.7
  Top Layer w15: R13.2 2354.84,1299.8 2480.04,1425 2975,1425 ; 2995,1445 3005,1445 v1(3050,1400) ; IC3.16 3057.8,1757.8 3015,1715 3015,1465 ; v1(3260,1030) 3266.7,1023.3 3266.7,997.24 3297.6,966.34 D2.2 ; 2975,1425 3015,1465 ; 2975,1425 3015,1465
  Bottom Layer w15: v1(3050,1400) 3260,1190 v1(3260,1030)
NetD3_2: D3.2 K7.2 | length 5716.3
  Top Layer w15: K7.2 285,1365 v1(540,1620) ; v1(3890,1670) v1(3890,1790) ; v1(3891.57,1536.77) 3891.57,1284.38 3965,1210.95 D3.2
  Bottom Layer w15: v1(540,1620) 643.35,1723.35 643.35,2043.35 750,2150 4081.21,2150 4090,2141.21 4090,1990 v1(3890,1790) ; v1(3890,1670) 3890.78,1669.22 3890.78,1537.55 v1(3891.57,1536.77)
NetIC2_2: IC2.2 IC3.6 K4.10 R21.1 | length 4424.5
  Top Layer w15: K4.10 1330,1730 v1(1480,1730) ; v1(1661.01,1794.22) 1815.23,1640 v1(1950,1640) ; v1(2080,1650) 2160,1650 2192.5,1617.5 ; R21.1 2320.36,1585 2448.49,1713.14 2448.49,1728.6 2497.4,1777.5 2539.11,1777.5 2585,1731.61 2585.59,1732.2 IC3.6 ; 2160,1585 2192.5,1617.5 ; v1(2290,1640) 2215,1640 2192.5,1617.5 ; v1(2390,1550) 2460,1480 v1(2860,1480) ; v1(3060,1460) 3305,1460 3375,1390 3620,1390 3737.8,1272.2 IC2.2
  Bottom Layer w15: v1(1480,1730) 1544.22,1794.22 v1(1661.01,1794.22) ; v1(1950,1640) 1955,1645 2075,1645 v1(2080,1650) ; v1(2290,1640) 2323.89,1606.11 2333.89,1606.11 v1(2390,1550) ; v1(2860,1480) 2869.47,1480 2889.47,1460 v1(3060,1460)
NetIC2_3: IC2.3 IC3.7 K4.9 R22.1 | length 3809
  Top Layer w15: K4.9 1235,1925 v1(1595,1925) ; v1(1745,1885) 2002.24,1885 2092.4,1794.84 R22.1 2092.4,1775.16 2122.56,1745 v1(2365,1745) ; v1(2515,1735) 2524.47,1735 2552.86,1706.61 IC3.7 ; v1(3180,1410) 3180,1400 3227.5,1352.5 3537.29,1352.5 3631.05,1258.74 3631.05,1197.68 3630,1196.63 3630,1110 3710.85,1029.15 3710.85,987.54 IC2.3
  Bottom Layer w15: v1(1595,1925) 1635,1885 v1(1745,1885) ; v1(2365,1745) 2370,1740 2510,1740 v1(2515,1735) ; 2450,1740 2610,1900 2690,1900 v1(3180,1410)
NetIC2_7: IC2.7 IC8.3 | length 1733.4
  Top Layer w15: IC2.7 3737.8,806.29 3760,784.08 v1(3760,780) ; v1(3850,880) 4280,880 4370,790 v1(4480,790) ; v1(4561.18,724.74) 4623.06,662.87 4697.03,662.87 4707.4,652.5 4742.6,652.5 4752.97,662.87 v1(4836.94,662.87) ; IC8.3 4950,733.11 5012.5,670.61 5059.39,670.61 v1(5060,670)
  Bottom Layer w15: v1(3760,780) 3760,785 3850,875 v1(3850,880) ; v1(4480,790) 4487.96,790 4553.22,724.74 v1(4561.18,724.74) ; v1(4836.94,662.87) 4844.08,670 v1(5060,670)
NetIC3_12: IC3.12 R4.2 R5.1 | length 1555
  Top Layer w15: IC3.12 3223.62,1655.43 3240.53,1638.52 v1(3250,1638.52) ; v1(3954.95,2022.08) 4007.08,2022.08 4015,2030 ; R5.1 4000.43,2117.13 R5.1@4015,2102.56 ; R5.1@4015,2102.56 R4.2 R5.1@4015,2102.56
  Bottom Layer w15: v1(3250,1638.52) 3250,1790.64 3479.36,2020 3952.87,2020 v1(3954.95,2022.08)
NetIC5_1: IC5.1 NC1.2 | length 125.1
  Top Layer w15: NC1.2 3917.6,678.98 3921.58,675 IC5.1
NetIC5_2: IC5.2 IC6.2 IC7.2 IC8.1 IC8.5 IC8.6 IC9.3 K5.2 K6.1 R1.2 R3.1 | length 9570.3
  Top Layer w15: v1(2355,895) 2355,847.5 2358.35,844.15 2358.35,802.16 IC6.2 ; v1(3420,2220) 3519.08,2120.92 3544.43,2120.92 IC9.3 ; IC7.2 3442.3,507.18 3473.8,507.18 3507.59,473.39 3536.61,473.39 v1(3543.3,466.7) ; v1(3845,595) 3849.19,595 3879.19,625 IC5.2 ; R1.2 4525.87,1107.13 4539.04,1093.96 4546.91,1093.96 4798.88,841.99 4888.01,841.99 ; v1(4725,695) 4798.54,768.54 IC8.1 ; IC8.6 4950,922.63 4961.41,911.21 4961.41,898.59 v1(4995,865) ; R3.1 4975,608.11 4850,733.11 IC8.1 ; IC8.5 4997.6,959.06 4997.6,867.6 v1(4995,865) ; v1(5355,715) 5402.5,715 5411.87,705.63 5444.37,705.63 K6.1 5905,1149.41 5905,2016.21 5866.21,2055 K5.2 ; v1(5510,1780) 5707.19,1582.81 5905,1582.81 ; IC8.1 4850,803.98 4888.01,841.99 ; 4888.01,841.99 4911.02,865 v1(4995,865)
  Bottom Layer w15: v1(2355,895) 2565,895 2995,465 3541.61,465 v1(3543.3,466.7) 3545,465 3715,465 v1(3845,595) 4005,595 4047.5,637.5 4382.6,637.5 4412.6,607.5 4637.5,607.5 v1(4725,695) ; v1(3420,2220) 3413.3,2226.7 3413.3,2246.7 3410,2250 5040,2250 v1(5510,1780) ; v1(4995,865) 5145,715 v1(5355,715)
NetIC5_3: IC5.3 IC6.3 IC7.3 R1.1 T1.2 | length 3656
  Top Layer w15: v1(2385,725) 2391.7,731.7 2391.7,748.38 2410,766.68 IC6.3 ; T1.2 2842.83,997.6 2806.93,961.7 2781.7,961.7 v1(2775,955) 3081.54,955 3396.54,640 ; IC7.3 3407.99,560 3378.68,589.31 3378.68,622.14 3396.54,640 ; 3750,545 3752.82,547.82 3752.82,578.21 v1(3759.52,584.91) ; IC5.3 3913.5,575 3883.5,545 ; v1(4380,1030) 4380,1032.13 4455,1107.13 R1.1 ; 3396.54,640 3590,640 3685,545 ; 3685,545 3883.5,545 ; 3685,545 3883.5,545
  Bottom Layer w15: v1(2385,725) 2312.5,797.5 2312.5,912.6 2354.9,955 v1(2775,955) ; v1(3759.52,584.91) 3900,725.39 3900,950 4300,950 v1(4380,1030)
NetIC5_6: IC5.6 R12.1 | length 536.6
  Top Layer w15: IC5.6 4315,575 4485,405 R12.1
NetIC5_8: IC5.8 NC2.2 | length 111.8
  Top Layer w15: IC5.8 4133.98,736.73 4162.4,765.16 NC2.2
NetIC6_1: IC6.1 NC3.2 | length 331.9
  Top Layer w15: NC3.2 2248.58,707.6 2310,769.02 IC6.1
NetIC6_6: IC6.6 R13.1 | length 262.4
  Top Layer w15: R13.1 2345,1085.98 2410,1020.98 IC6.6
NetIC6_8: IC6.8 NC4.2 | length 318.4
  Top Layer w15: NC4.2 2281.18,1049.8 2310,1020.98 IC6.8
NetIC7_1: IC7.1 R10.2 | length 295.7
  Top Layer w15: R10.2 3395,444.68 3410.33,460 IC7.1
NetIC7_6: IC7.6 R14.1 | length 405.3
  Top Layer w15: R14.1 2904.84,680.2 3025.04,560 IC7.6
NetIC7_8: IC7.8 R11.2 | length 293.4
  Top Layer w15: R11.2 3225,456.02 3228.98,460 IC7.8
NetIC8_2: IC8.2 R2.2 R3.2 | length 574.2
  Top Layer w15: IC8.2 4900,733.11 5035,598.11 5035,395 ; R3.2 4979.57,375 5015,375 5035,395 ; R2.2 5035,395
NetIC8_7: IC8.7 T1.1 | length 2432.5
  Top Layer w15: T1.1 2852,1072.71 2852,1120 2966,1234 3560.33,1234 v1(3560.67,1233.67) ; v1(4635,1075) 4640,1080 4750,1080 v1(4755,1085) ; IC8.7 4900,1080 v1(4905,1085)
  Bottom Layer w15: v1(3560.67,1233.67) 3653.56,1233.67 3677.34,1257.45 3777.2,1257.45 3914.64,1120 4112.86,1120 4196.43,1203.57 4363.57,1203.57 4492.14,1075 v1(4635,1075) ; v1(4755,1085) v1(4905,1085)
NetIC9_1: IC9.1 IC9.4 R5.2 | length 426.9
  Top Layer w15: IC9.1 3551.08,2189.08 3574.85,2189.08 3624.15,2139.77 3624.15,2120.92 3627.48,2117.6 IC9.4 3657.01,2117.6 3664.41,2125 R5.2
NetK1_3: K1.3 S4.1 | length 2304.3
  Bottom Layer w15: S4.1 535.82,1453.56 535.82,612.37 730.25,417.93 1302.07,417.93 K1.3
NetK1_5: K1.5 OLED1.2 | length 1767.3
  Bottom Layer w15: OLED1.2 1309.38,1370.63 1892.5,787.5 1892.5,442.67 1735,285.17 K1.5
Netk2_1: k2.1 R17.2 | length 92.6
  Top Layer w15: k2.1 R17.2
Netk2_2: k2.2 R15.2 R16.1 | length 511.6
  Top Layer w15: R15.2 2318.81,512.4 2335,496.21 ; k2.2 2335,496.21 ; R16.1 2343.79,505 2335,496.21
Netk2_3: k2.3 R18.2 | length 99.3
  Top Layer w15: R18.2 2435,270.2 k2.3
Netk2_4: k2.4 LED1.1 LED2.2 | length 375
  Top Layer w15: k2.4 2535,265 LED1.1 2655,285 2659.05,280.95 LED2.2
NetK3_3: K3.3 S1.4 | length 2387.9
  Top Layer w15: S1.4 965,505 v1(1055,595) ; v1(1525,1065) v1(1945,1485)
  Bottom Layer w15: v1(1055,595) v1(1525,1065) ; v1(1945,1485) 1951.7,1491.7 1991.8,1491.7 2258.62,1758.52 2258.62,1808.62 K3.3
NetK3_4: K3.4 S2.4 | length 2577.3
  Top Layer w15: S2.4 839.56,608.3 868.3,608.3 v1(875,615) ; v1(1435,1145) 1755,1465 1765,1465 v1(1815,1515)
  Bottom Layer w15: v1(875,615) 1398.3,1138.3 1428.3,1138.3 v1(1435,1145) ; v1(1815,1515) 1815,1573.82 2101.06,1859.88 2209.88,1859.88 K3.4
NetK3_5: K3.5 S3.4 | length 2945.6
  Top Layer w15: S3.4 357.01,465.75 357.01,523.58 867.57,1034.14 953.43,1034.14 1466,1546.71 1466,1586.69 1603.08,1723.76 1603.08,1833.08 1767.91,1997.91 1877.22,1997.91 2014.3,2134.98 2285.02,2134.98 K3.5
NetK3_6: K3.6 R23.2 R24.1 | length 1676
  Top Layer w15: v1(1895,1355) 1925,1385 1935,1385 1965,1415 R23.2 R24.1 ; K3.6 2235,1915 2268.79,1881.21 2281.21,1881.21 2345,1945 v1(2475,1945)
  Bottom Layer w15: v1(1895,1355) 2032.5,1492.5 2182.5,1492.5 2207.5,1517.5 2207.5,1667.5 2445,1905 2445,1915 v1(2475,1945)
NetK3_7: K3.7
NetK3_8: K3.8 OLED1.6 | length 735.4
  Bottom Layer w15: OLED1.6 K3.8
NetK4_3: K4.3 OLED1.5 | length 627.7
  Bottom Layer w15: OLED1.5 1415,1825 K4.3
NetK4_4: K4.4 OLED1.4 | length 627.7
  Bottom Layer w15: OLED1.4 1315,1825 K4.4
NetK4_5: K4.5 OLED1.3 | length 627.7
  Bottom Layer w15: OLED1.3 1215,1825 K4.5
NetLED1_2: LED1.2 LED2.1 R18.1 | length 416.6
  Top Layer w15: R18.1 2504.92,355 2553.03,403.11 LED1.2 2655,403.11 2659.05,399.06 LED2.1
NetLED3_2: LED3.2 R17.1 | length 121.5
  Top Layer w15: LED3.2 2118.54,352.4 R17.1
NetLED4_2: LED4.2 R19.1 | length 168
  Top Layer w15: LED4.2 4436.97,2004.06 4497.6,2064.69 R19.1
NetNC1_1: NC1.1 NC2.1 | length 95.2
  Top Layer w15: NC1.1 NC2.1
NetNC3_1: NC3.1 NC4.1 | length 192.6
  Top Layer w15: NC3.1 NC4.1
NetR10_1: R10.1 R11.1 | length 174.1
  Top Layer w15: R11.1 3385,115 R10.1
VCC: C5.2 C6.2 C7.2 C8.2 C9.2 C14.1 D3.1 IC5.7 IC6.7 IC7.7 IC8.8 IC10.5 IC10.8 R16.2 R24.2 T1.3 | length 8865
  Top Layer w15: R24.2 2082.4,1235.16 2094.59,1222.97 2158.01,1222.97 2205.98,1175 ; v1(2275,1175) 2205.98,1175 ; R16.2 R16.2@2434.84,430.2 ; v1(2775,1025) 2780.69,1030.69 2934,1030.69 T1.3 ; v1(3045,355) 2951.83,448.17 2518.22,448.17 2500.25,430.2 R16.2@2434.84,430.2 ; 3070.71,361.7 3219.02,510 IC7.7 ; v1(3495,225) 3495,174.65 3566.54,103.11 C9.2 C8.2 C7.2 4063.46,103.11 4106.53,60.05 4119.95,60.05 v1(4126.65,53.35) ; D3.1 D3.1@3969.06,1334.03 ; 3969.06,1508 4218.06,1259 4915,1259 ; C5.2 C5.2@3969.06,1560.95 ; IC5.7 4167.39,625 4192.39,600 4360,600 v1(4365,595) 4635,865 4635,875 v1(4665,905) ; v1(4735,975) 4844.2,975 IC8.8@4850,969.2 ; IC8.8 IC8.8@4850,969.2 ; IC10.5 5006.61,1936.61 v1(5045,1975) 5045,2025 ; IC10.8 4993.39,2013.39 5005,2025 5045,2025 ; v1(4955,1495) 4925,1465 4915,1465 ; C14.1 5045,2025 ; 2205.98,1175 2360,1020.98 IC6.7 2360,957.99 2417.75,900.25 2433.21,900.25 2489.31,844.15 2489.31,484.66 R16.2@2434.84,430.2 ; D3.1@3969.06,1334.03 C5.2@3969.06,1560.95 ; D3.1@3969.06,1334.03 C5.2@3969.06,1560.95 ; IC8.8@4850,969.2 4850,1099.9 4915,1164.9 ; 4915,1164.9 4915,1465 ; 4915,1164.9 4915,1465
  Bottom Layer w15: v1(2275,1175) 2425,1025 v1(2775,1025) ; v1(3045,355) 3365,355 v1(3495,225) ; v1(4126.65,53.35) 4125,55 4125,355 v1(4365,595) ; v1(4665,905) v1(4735,975) ; v1(4955,1495) 4955,1835 5045,1925 v1(5045,1975)
pads on no net: D1.1 IC1.3 IC1.5 IC4.3 IC4.5 IC9.2 IC9.5 IC10.6 IC10.7 K1.1 K1.2 K1.4 K1.8 k2.5 k2.6 K3.1 K3.2 K4.1 K4.2 K4.6 K4.8 K6.2 K6.3 K6.5 K6.6 K7.3 S1.2 S1.3 S2.1 S2.3 S3.1 S3.3 S4.2 S4.3

## Polygon pours and split planes (outlines as drawn)
GND on Bottom Layer "GND_L02_P000" (solid, pour order 0): 5990,2290 10,2290 10,10 5990,10

## Silkscreen, mask and mechanical layers (free items; w line width, h text height)
boardOutline:
  the board outline again, w10

## Text inside footprints (layer, text, board x,y; h text height)
OLED1: Top Overlay "1" at 1010.28,1631.93 h40; Top Overlay "7" at 1600.04,1631.93 h40